# Altium PCB BK5932.PcbDoc
Units mm, origin at the board's own origin, x right, y up, seen from the top; angles counter-clockwise.
Board outline 27.94 x 28.57 mm, 2 copper layers (Top Layer, Bottom Layer); 28 components, 23 nets, 101 pads, 28 vias.
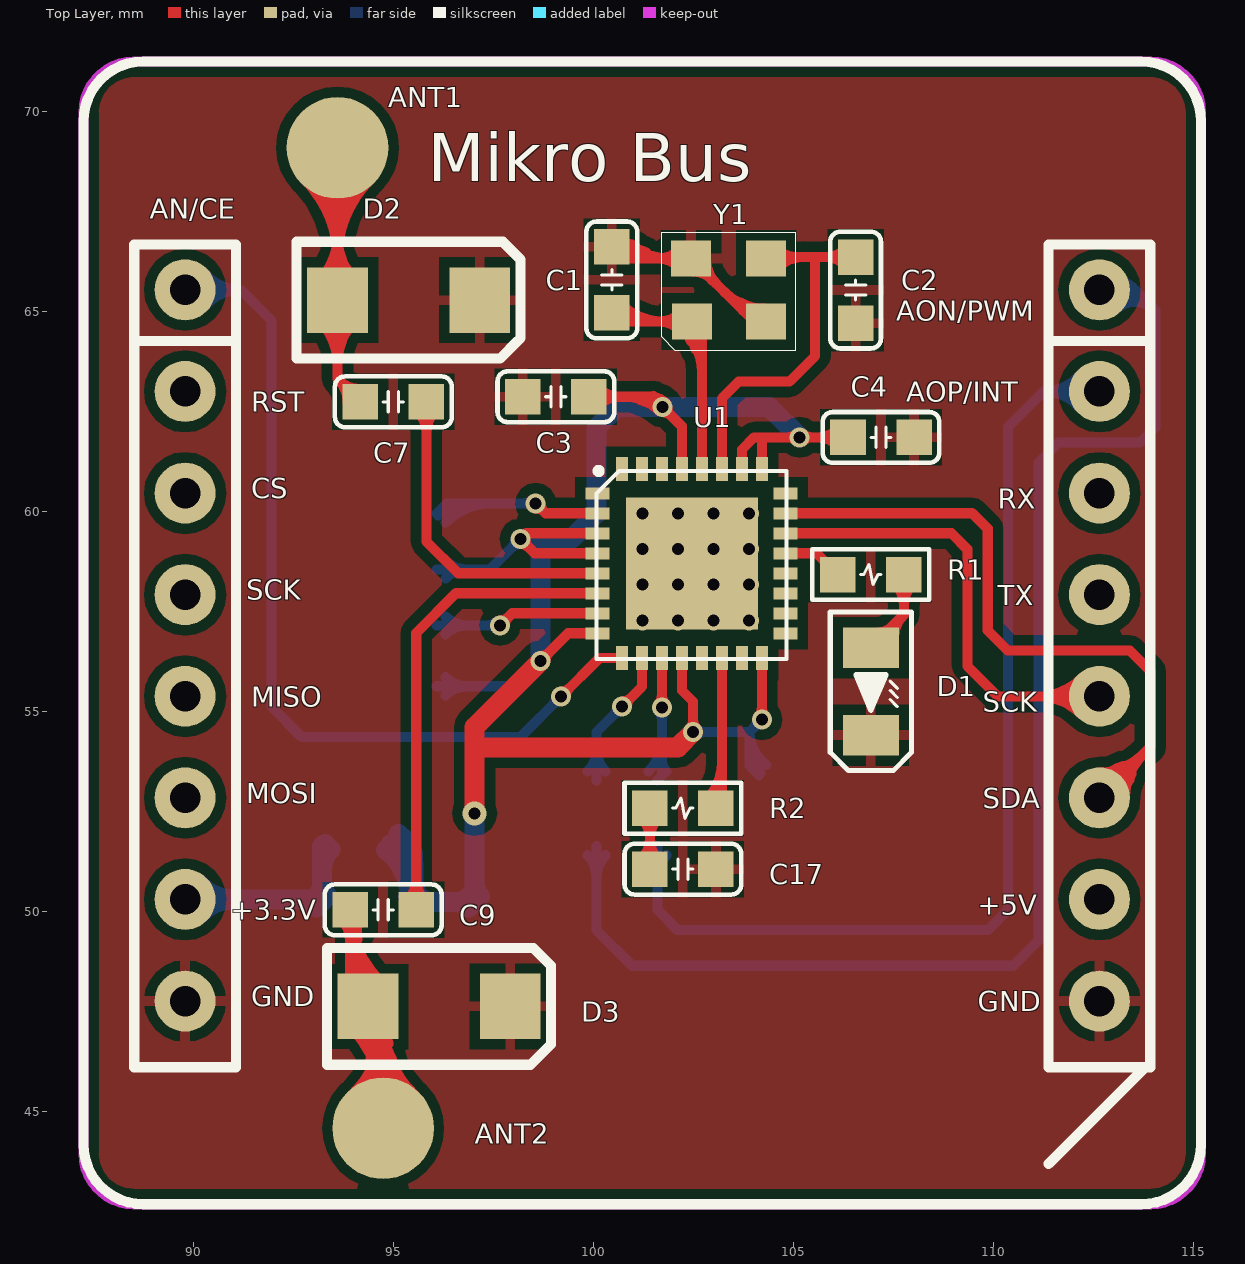
[diagram p0: Top Layer view]
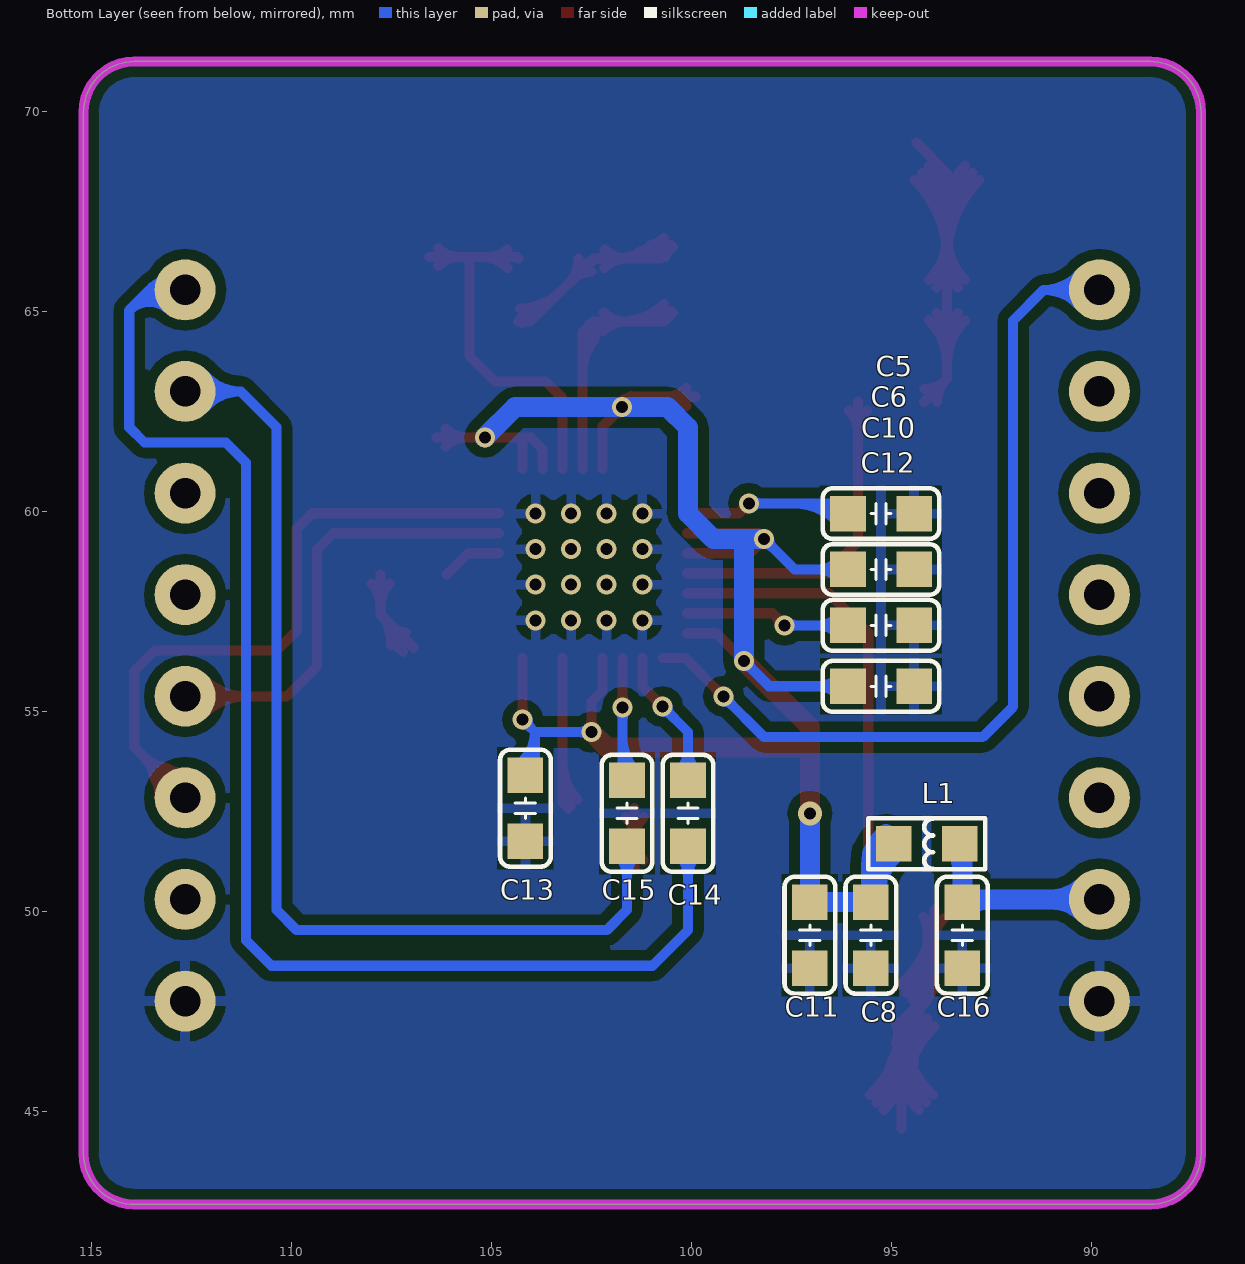
[diagram p1: Bottom Layer view, seen from below]
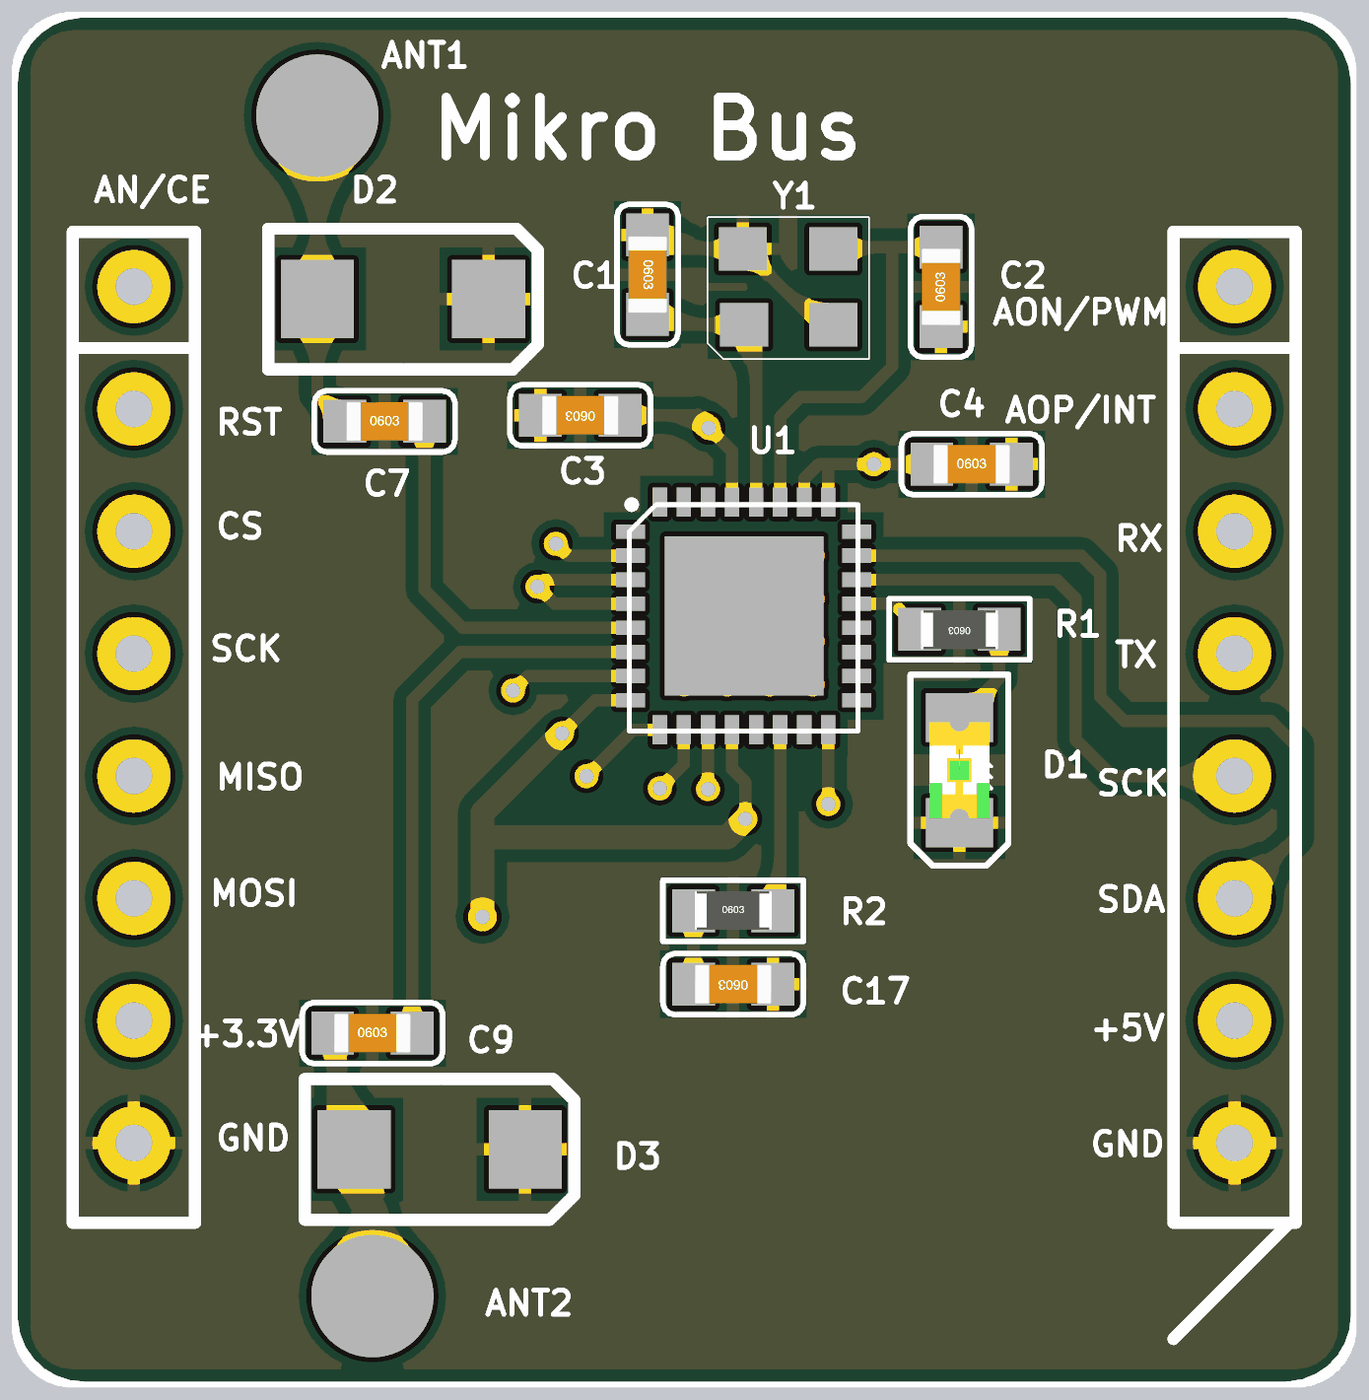
[diagram p2: 3D render of the assembled board from above, using the file's embedded part models]
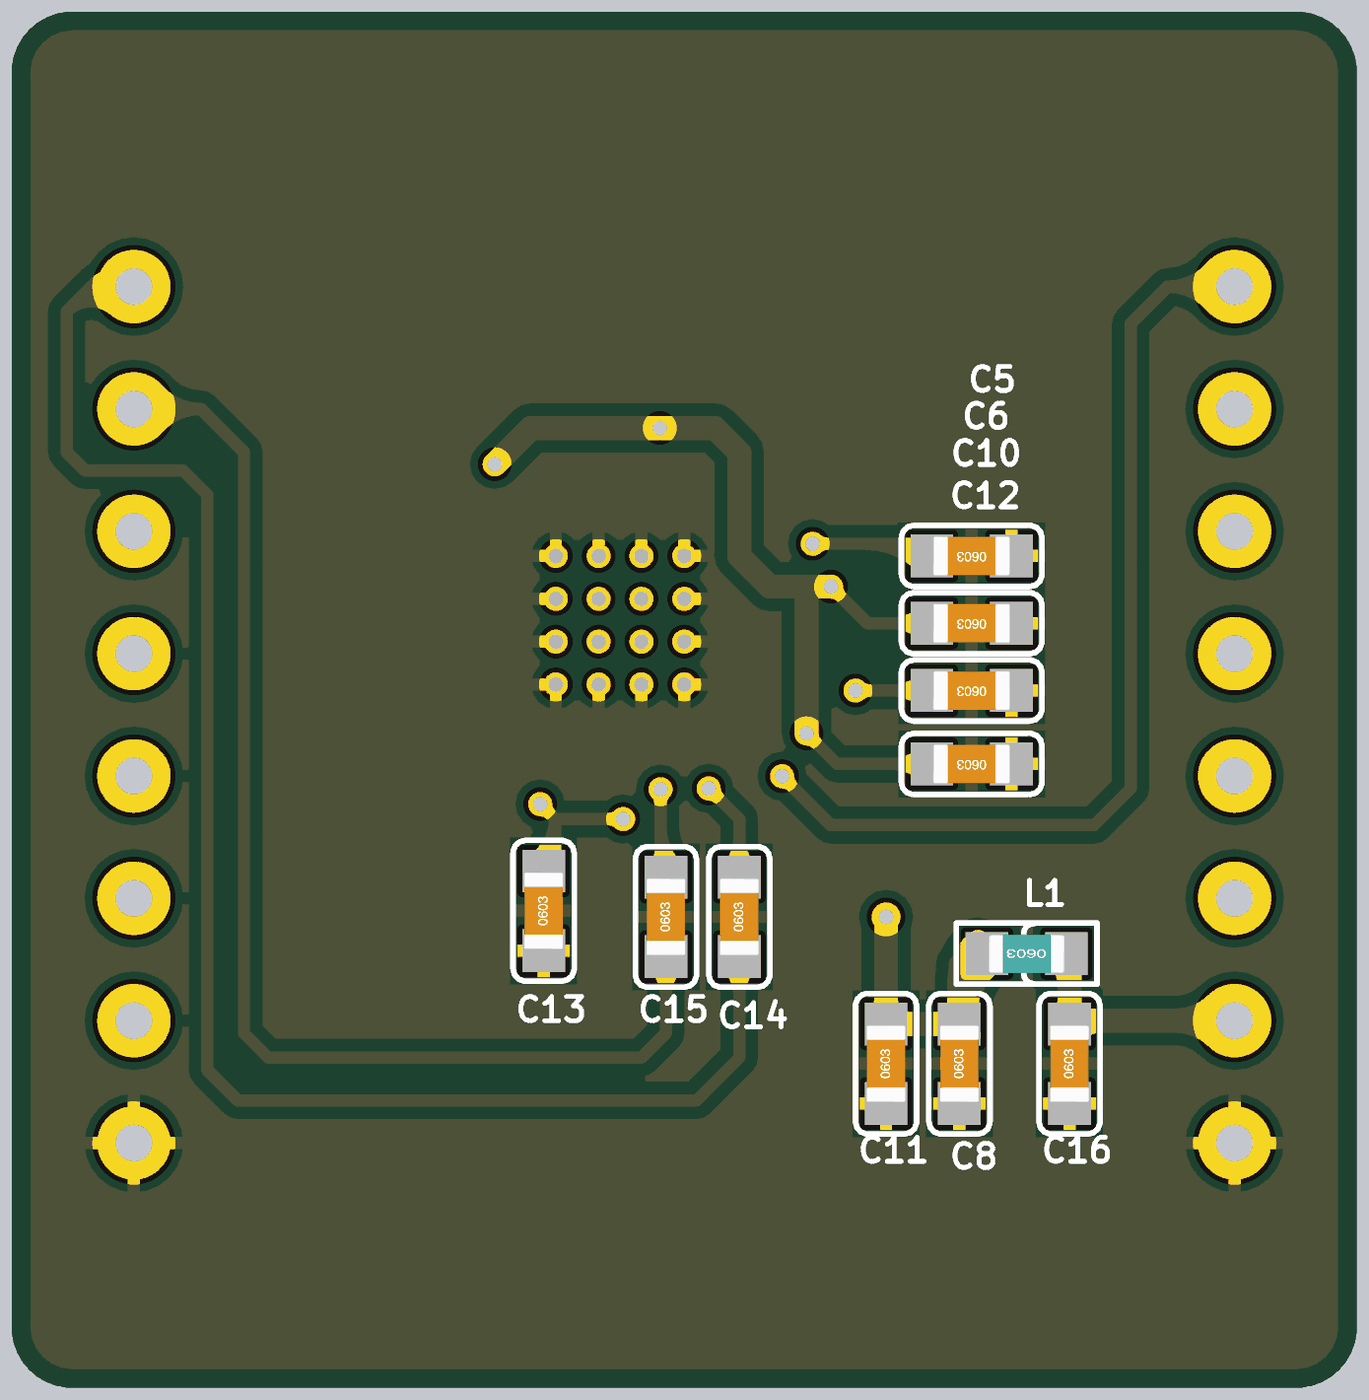
[diagram p3: 3D render of the assembled board from below, using the file's embedded part models]

## Layer stack, top to bottom
Top Solder: solder mask 0.0102, Solder Resist, Dk 3.5
Top Layer: signal copper 0.0356
Dielectric 1: dielectric 0.32, FR-4, Dk 4.8
Bottom Layer: signal copper 0.0356
Bottom Solder: solder mask 0.0102, Solder Resist, Dk 3.5

## Board outline
87.249,43.942 ccw(c88.519,43.942) 88.519,42.672 113.919,42.672 ccw(c113.919,43.942) 115.189,43.942 115.189,69.977 ccw(c113.919,69.977) 113.919,71.247 88.519,71.247 ccw(c88.519,69.977) 87.249,69.977

## Design rules (kind name [scope] priority, off if disabled: settings)
Clearance [All] p1: gap=0.254
PolygonConnect [All] p1: connectstyle=Relief reliefconductorwidth=0.254 reliefentries=4 polygonreliefangle="90 Angle" airgapwidth=0.254
RoutingVias [All] p1: holewidth=0.711 width=1.27 viastyle="Through Hole" minholewidth=0.3 minwidth=0.5 maxholewidth=0.711 maxwidth=1.27
SolderMaskExpansion [All] p1: expansion=0.102
Width [All] p1: maxlimit=1 minlimit=0.254 preferedwidth=0.254
29 further rules are at their usual default settings.

## Components (designator, comment, footprint, x,y, rotation, side; value= is the part's Value field where it differs from the comment)
ANT1 "弹簧天线" ANT 93.599,69.088 r90 top
ANT2 "弹簧天线" ANT 94.742,44.577 r90 top
C1 "10pF" C0603 100.457,65.786 r270 top
C2 "10pF" C0603 106.553,65.532 r90 top
C3 "1uF" C0603 99.06,62.865 r180 top
C4 "1uF" C0603 107.188,61.849 r0 top
C5 "4.7uF" C0603 95.25,59.944 r0 bottom
C6 "1uF" C0603 95.25,58.547 r0 bottom
C7 "30pF" C0603 94.996,62.738 r0 top
C8 "0.1uF" C0603 95.504,49.403 r90 bottom
C9 "30pF" C0603 94.742,50.038 r0 top
C10 "4.7uF" C0603 95.25,57.15 r0 bottom
C11 "10uF" C0603 97.028,49.403 r90 bottom
C12 "1uF" C0603 95.25,55.626 r0 bottom
C13 "1uF" C0603 104.14,52.578 r90 bottom
C14 "2.2uF" C0603 100.076,52.451 r90 bottom
C15 "2.2uF" C0603 101.6,52.451 r90 bottom
C16 "10uF" C0603 93.218,49.403 r90 bottom
C17 "1uF" C0603 102.235,51.054 r180 top
D1 "普红" "LED 0805" 106.934,55.499 r270 top
D2 "SMAJ5.0CA" SMAJ 95.377,65.278 r180 top (schematic designator ESD1)
D3 "SMAJ5.0CA" SMAJ 96.139,47.625 r180 top (schematic designator ESD2)
L1 "1k@100MHz" L0603 94.107,51.689 r0 bottom
R1 "1K" R0603 106.934,58.42 r180 top
R2 "27R" R0603 102.235,52.578 r0 top
U1 "BK9532" QFN32 100.711,60.452 r0 top locked
U2 "MikroBus" MikroBus 87.249,71.247 r0 top locked
Y1 "24.576M" "晶振   有源2520" 103.378,65.532 r0 top

## Footprints (in the part's own frame and the unit in brackets; to place one, negate y for a bottom-side part, rotate by r counter-clockwise, add the part's x,y. Pads: shape width x height; smd on the part's side, far side on the other; paste and mask are expansions set on the pad)
ANT [mm] "弹簧天线"
  round 2.54 smd: 1(0,0)
C0603 [mil] "0603-100nF/25V    104K    贴片层叠电容"
  rect 35x35 smd: 1(-32.5,0) 2(32.5,0)
  silkscreen extent -58,-25 58,25, body extent -31,-16 32,16, height 32
L0603 [mil]
  rect 35x35 smd: 1(-32.5,0) 2(32.5,0)
  silkscreen extent -58,-25 58,25, body extent -31,-15 31,16, height 31
"LED 0805" [mil] "普通亮度，高亮绿灯用"
  rect 40x55 smd: 1(-43,0) 2(43,0)
  silkscreen extent -78,-40 78,40, body extent -39,-25 39,25, height 32
MikroBus [mil] "Mikro Bus General Purpose Module"
  round 60 hole 30: 1(1000,-924.8) 2(1000,-824.8) 3(1000,-724.8) 4(1000,-624.8) 5(1000,-524.8) 6(1000,-424.8) 7(1000,-324.8) 8(1000,-224.8) 9(100,-224.8) 10(100,-324.8) 11(100,-424.8) 12(100,-524.8) 13(100,-624.8) 14(100,-724.8) 15(100,-824.8) 16(100,-924.8)
  silkscreen extent 0,-1125 1100,0
QFN32 [mm] "BK953* 5x5"
  rect 0.6x0.3 smd: 1(-0.61,0) 2(-0.61,-0.5) 3(-0.61,-1) 4(-0.61,-1.5) 5(-0.61,-2) 6(-0.61,-2.5) 7(-0.61,-3) 8(-0.61,-3.5) 17(4.089,-3.5) 18(4.089,-3) 19(4.089,-2.5) 20(4.089,-2) 21(4.089,-1.5) 22(4.089,-1) 23(4.089,-0.5) 24(4.089,0)
  rect 0.3x0.6 smd: 9(0,-4.115) 10(0.5,-4.115) 11(1,-4.115) 12(1.5,-4.115) 13(2,-4.115) 14(2.5,-4.115) 15(3,-4.115) 16(3.5,-4.115) 25(3.5,0.61) 26(3,0.61) 27(2.5,0.61) 28(2,0.61) 29(1.5,0.61) 30(1,0.61) 31(0.5,0.61) 32(0,0.61)
  rect 3.3x3.3 smd: 33(1.753,-1.753)
  silkscreen extent -0.64,-4.14 4.11,0.58
R0603 [mil]
  rect 35x35 smd: 1(-32.5,0) 2(32.5,0)
  silkscreen extent -58,-25 58,25, body extent -31,-15 31,16, height 16
SMAJ [mm]
  rect 1.52x1.63 smd: 1(-1.778,0) 2(1.778,0)
  silkscreen extent -2.8,-1.46 2.8,1.46
"晶振   有源2520" [mm]
  rect 1x0.9 smd: 1(-0.914,-0.787) 2(0.94,-0.787) 3(0.94,0.787) 4(-0.94,0.787)
  silkscreen extent -1.68,-1.5 1.68,1.45

## Part data
ANT1 ANT2: library part ANT, "ANT"
C1 C2: library part "CAP 0603-10pF/50V", "0603-10pF/50V 贴片层叠电容"
C3 C4 C5 C6 C8 C10 C11 C12 C13 C14 C15 C16 C17: library part "CAP 0805-68pF/50V", "0805-68pF/50V-J5%贴片层叠电容"
C7 C9: library part "CAP 0603-33pF/50V", "0603-33pF/50V   贴片层叠电容"
D1: library part "LED  0805普亮贴片红灯", "0805普亮贴片红灯"
D2 D3: library part "ESD 防浪涌二极管", "ESD 二极管"
L1: library part "电感  贴片  33UH", "磁珠"
R1 R2: library part RES1, "1206  K  5%  HS  贴片电阻"
U1: "QFN5x5 32"
Y1: library part "晶振  24.576MHz  49SMD", "（未入库）24.576MHz  2520"

## Via types
v1: diameter 0.5, hole 0.3, Top Layer to Bottom Layer, 27 vias
v2: diameter 0.6, hole 0.3, Top Layer to Bottom Layer, 1 vias

## Nets (pads, with @x,y where several pads share a name; then routed paths per layer and width w, separated by ;. In a path a pad name is that pad's centre, name@x,y a point inside that pad or via, vN(x,y) a via of type N, cw(c..) or ccw(c..) an arc to the next point about the centre after c; other vN are vias at no path point)
+5V: U2.2
AON: C14.1 U2.8 | length 51.8
  Bottom Layer w0.254: C14.1 100.076,49.53 100.965,48.641 110.49,48.641 111.125,49.276 111.125,61.214 111.633,61.722 113.665,61.722 114.046,62.103 114.046,65.024 ; U2.8 113.533,65.537 ; C14.1@99.851,51.401 cw(c99.309,50.859) 100.076,50.859 ; C14.1@99.851,51.401 cw(c99.309,50.859) 100.076,50.859 ; C14.1@99.851,51.401 cw(c99.309,50.859) 100.076,50.859 ; 100.076,50.859 cw(c100.843,50.859) C14.1@100.301,51.401 ; 100.076,50.859 cw(c100.843,50.859) C14.1@100.301,51.401 ; 100.076,50.859 cw(c100.843,50.859) C14.1@100.301,51.401 ; U2.8@112.566,65.633 cw(c113,65.133) 113.468,65.602 ; U2.8@112.566,65.633 cw(c113,65.133) 113.468,65.602 ; U2.8@112.566,65.633 cw(c113,65.133) 113.468,65.602 ; U2.8@112.732,65.441 cw(c113.179,64.927) 113.661,65.409 ; U2.8@112.732,65.441 cw(c113.179,64.927) 113.661,65.409 ; U2.8@112.732,65.441 cw(c113.179,64.927) 113.661,65.409 ; U2.8@112.899,65.25 cw(c113.359,64.722) 113.853,65.217 ; U2.8@112.899,65.25 cw(c113.359,64.722) 113.853,65.217 ; U2.8@112.899,65.25 cw(c113.359,64.722) 113.853,65.217 ; U2.8@113.066,65.058 cw(c113.538,64.516) 114.046,65.024 ; U2.8@113.066,65.058 cw(c113.538,64.516) 114.046,65.024 ; U2.8@113.066,65.058 cw(c113.538,64.516) 114.046,65.024 ; U2.8@113.251,65.334 cw(c113.533,65.239) 113.533,65.537 ; U2.8@113.251,65.334 cw(c113.533,65.239) 113.533,65.537 ; U2.8@113.251,65.334 cw(c113.533,65.239) 113.533,65.537 ; U2.8@113.251,65.74 ccw(c113.533,65.835) 113.533,65.537 ; U2.8@113.251,65.74 ccw(c113.533,65.835) 113.533,65.537 ; U2.8@113.251,65.74 ccw(c113.533,65.835) 113.533,65.537 ; 113.533,65.537 114.046,65.024
AOP: C15.1 U2.7 | length 39
  Bottom Layer w0.254: C15.1 101.6,50.038 102.108,49.53 109.855,49.53 110.363,50.038 110.363,62.103 111.257,62.997 ; U2.7 111.257,62.997 ; C15.1@101.375,51.401 cw(c100.833,50.859) 101.6,50.859 ; C15.1@101.375,51.401 cw(c100.833,50.859) 101.6,50.859 ; C15.1@101.375,51.401 cw(c100.833,50.859) 101.6,50.859 ; 101.6,50.859 cw(c102.367,50.859) C15.1@101.825,51.401 ; 101.6,50.859 cw(c102.367,50.859) C15.1@101.825,51.401 ; 101.6,50.859 cw(c102.367,50.859) C15.1@101.825,51.401 ; 111.257,62.997 cw(c111.257,61.789) U2.7@112.169,62.581 ; 111.257,62.997 ccw(c111.257,64.205) U2.7@112.169,63.413 ; 111.257,62.997 cw(c111.257,61.789) U2.7@112.169,62.581 ; 111.257,62.997 ccw(c111.257,64.205) U2.7@112.169,63.413 ; 111.257,62.997 cw(c111.257,61.789) U2.7@112.169,62.581 ; 111.257,62.997 ccw(c111.257,64.205) U2.7@112.169,63.413 ; 111.814,62.997 cw(c111.814,62.272) U2.7@112.361,62.747 ; 111.814,62.997 ccw(c111.814,63.722) U2.7@112.361,63.247 ; 111.814,62.997 cw(c111.814,62.272) U2.7@112.361,62.747 ; 111.814,62.997 ccw(c111.814,63.722) U2.7@112.361,63.247 ; 111.814,62.997 cw(c111.814,62.272) U2.7@112.361,62.747 ; 111.814,62.997 ccw(c111.814,63.722) U2.7@112.361,63.247
GND: C1.1 C2.1 C3.2 C4.2 C5.1 C6.1 C8.1 C10.1 C11.1 C12.1 C13.1 C16.1 C17.1 D1.2 D2.1 D3.1 U1.33 U2.1 U2.16 Y1.2 Y1.4 | length 34.8
  Top Layer w0.254: C1.1 100.749,66.319 Y1.4 104.013,64.745 Y1.2 ; C1.1@100.502,66.566 cw(c100.811,66.254) 101.031,66.635 ; C1.1@100.502,66.566 cw(c100.811,66.254) 101.031,66.635 ; C1.1@100.502,66.566 cw(c100.811,66.254) 101.031,66.635 ; C1.1@100.502,66.656 ccw(c101.315,67.47) 101.315,66.319 ; C1.1@100.502,66.656 ccw(c101.315,67.47) 101.315,66.319 ; C1.1@100.502,66.656 ccw(c101.315,67.47) 101.315,66.319 ; C1.1@100.646,66.357 cw(c100.832,66.107) 100.987,66.376 ; C1.1@100.646,66.357 cw(c100.832,66.107) 100.987,66.376 ; C1.1@100.646,66.357 cw(c100.832,66.107) 100.987,66.376 ; C1.1@100.68,66.386 cw(c101.053,66.008) 101.319,66.468 ; C1.1@100.68,66.386 cw(c101.053,66.008) 101.319,66.468 ; C1.1@100.68,66.386 cw(c101.053,66.008) 101.319,66.468 ; C1.1@100.682,66.836 ccw(c101.929,68.083) 101.929,66.319 ; C1.1@100.682,66.836 ccw(c101.929,68.083) 101.929,66.319 ; C1.1@100.682,66.836 ccw(c101.929,68.083) 101.929,66.319 ; C1.1@100.767,66.678 ccw(c101.217,66.774) 100.987,66.376 ; C1.1@100.767,66.678 ccw(c101.217,66.774) 100.987,66.376 ; C1.1@100.767,66.678 ccw(c101.217,66.774) 100.987,66.376 ; 101.608,66.319 cw(c101.608,65.54) Y1.4@102.16,66.091 ; 101.608,66.319 ccw(c101.608,67.099) Y1.4@102.16,66.548 ; 101.608,66.319 cw(c101.608,65.54) Y1.4@102.16,66.091 ; 101.608,66.319 ccw(c101.608,67.099) Y1.4@102.16,66.548 ; 101.608,66.319 cw(c101.608,65.54) Y1.4@102.16,66.091 ; 101.608,66.319 ccw(c101.608,67.099) Y1.4@102.16,66.548 ; Y1.4@102.471,66.253 cw(c102.299,65.592) 102.959,65.768 ; Y1.4@102.471,66.253 cw(c102.299,65.592) 102.959,65.768 ; Y1.4@102.471,66.253 cw(c102.299,65.592) 102.959,65.768 ; Y1.4@102.488,65.996 cw(c102.488,65.337) 102.954,65.803 ; Y1.4@102.488,65.996 cw(c102.488,65.337) 102.954,65.803 ; Y1.4@102.488,65.996 cw(c102.488,65.337) 102.954,65.803 ; Y1.4@102.811,66.319 ccw(c103.712,66.319) 103.075,65.683 ; Y1.4@102.811,66.319 ccw(c103.712,66.319) 103.075,65.683 ; Y1.4@102.811,66.319 ccw(c103.712,66.319) 103.075,65.683 ; 103.281,65.476 ccw(c104.268,66.463) Y1.2@104.268,65.068 ; 103.281,65.476 ccw(c104.268,66.463) Y1.2@104.268,65.068 ; 103.281,65.476 ccw(c104.268,66.463) Y1.2@104.268,65.068 ; 103.568,65.255 cw(c103.316,64.311) Y1.2@104.205,64.716 ; 103.568,65.255 cw(c103.316,64.311) Y1.2@104.205,64.716 ; 103.568,65.255 cw(c103.316,64.311) Y1.2@104.205,64.716 ; 103.715,65.043 ccw(c104.268,65.595) Y1.2@104.268,64.814 ; 103.715,65.043 ccw(c104.268,65.595) Y1.2@104.268,64.814 ; 103.715,65.043 ccw(c104.268,65.595) Y1.2@104.268,64.814
  other v1: 101.219,57.277 102.108,57.277 102.997,57.277 103.886,57.277 101.219,58.166 102.108,58.166 102.997,58.166 103.886,58.166 101.219,59.055 102.108,59.055 102.997,59.055 103.886,59.055 101.219,59.944 102.108,59.944 102.997,59.944 103.886,59.944
NetANT1_1: ANT1.1 C7.1 D2.2 | length 64
  Top Layer w0.254: C7.1 93.599,63.309 D2.2 93.599,68.453 ANT1.1@94.361,69.215 ; ANT1.1@92.791,68.28 cw(c90.84,66.329) 93.599,66.329 ; ANT1.1@92.791,68.28 cw(c90.84,66.329) 93.599,66.329 ; ANT1.1@92.791,68.28 cw(c90.84,66.329) 93.599,66.329 ; ANT1.1@92.97,68.459 cw(c91.453,66.942) 93.599,66.942 ; ANT1.1@92.97,68.459 cw(c91.453,66.942) 93.599,66.942 ; ANT1.1@92.97,68.459 cw(c91.453,66.942) 93.599,66.942 ; ANT1.1@93.15,68.639 cw(c92.066,67.555) 93.599,67.555 ; ANT1.1@93.15,68.639 cw(c92.066,67.555) 93.599,67.555 ; ANT1.1@93.15,68.639 cw(c92.066,67.555) 93.599,67.555 ; D2.2@93.151,64.775 cw(c92.071,63.695) 93.599,63.695 ; D2.2@93.151,64.775 cw(c92.071,63.695) 93.599,63.695 ; D2.2@93.151,64.775 cw(c92.071,63.695) 93.599,63.695 ; D2.2@93.151,65.781 ccw(c92.071,66.861) 93.599,66.861 ; D2.2@93.151,65.781 ccw(c92.071,66.861) 93.599,66.861 ; D2.2@93.151,65.781 ccw(c92.071,66.861) 93.599,66.861 ; D2.2@93.331,64.955 cw(c92.684,64.308) 93.599,64.308 ; D2.2@93.331,64.955 cw(c92.684,64.308) 93.599,64.308 ; D2.2@93.331,64.955 cw(c92.684,64.308) 93.599,64.308 ; D2.2@93.331,65.601 ccw(c92.684,66.248) 93.599,66.248 ; D2.2@93.331,65.601 ccw(c92.684,66.248) 93.599,66.248 ; D2.2@93.331,65.601 ccw(c92.684,66.248) 93.599,66.248 ; 93.599,63.695 cw(c95.127,63.695) D2.2@94.047,64.775 ; 93.599,63.695 cw(c95.127,63.695) D2.2@94.047,64.775 ; 93.599,63.695 cw(c95.127,63.695) D2.2@94.047,64.775 ; 93.599,64.308 cw(c94.514,64.308) D2.2@93.867,64.955 ; 93.599,64.308 cw(c94.514,64.308) D2.2@93.867,64.955 ; 93.599,64.308 cw(c94.514,64.308) D2.2@93.867,64.955 ; 93.599,66.248 ccw(c94.514,66.248) D2.2@93.867,65.601 ; 93.599,66.248 ccw(c94.514,66.248) D2.2@93.867,65.601 ; 93.599,66.248 ccw(c94.514,66.248) D2.2@93.867,65.601 ; 93.599,66.329 cw(c96.358,66.329) ANT1.1@94.407,68.28 ; 93.599,66.329 cw(c96.358,66.329) ANT1.1@94.407,68.28 ; 93.599,66.329 cw(c96.358,66.329) ANT1.1@94.407,68.28 ; 93.599,66.861 ccw(c95.127,66.861) D2.2@94.047,65.781 ; 93.599,66.861 ccw(c95.127,66.861) D2.2@94.047,65.781 ; 93.599,66.861 ccw(c95.127,66.861) D2.2@94.047,65.781 ; 93.599,66.942 cw(c95.745,66.942) ANT1.1@94.228,68.459 ; 93.599,66.942 cw(c95.745,66.942) ANT1.1@94.228,68.459 ; 93.599,66.942 cw(c95.745,66.942) ANT1.1@94.228,68.459 ; 93.599,67.555 cw(c95.132,67.555) ANT1.1@94.048,68.639 ; 93.599,67.555 cw(c95.132,67.555) ANT1.1@94.048,68.639 ; 93.599,67.555 cw(c95.132,67.555) ANT1.1@94.048,68.639 ; 93.628,63.28 cw(c93.086,62.738) C7.1@93.853,62.738 ; 93.628,63.28 ccw(c94.17,63.822) C7.1@94.17,63.055 ; 93.628,63.28 cw(c93.086,62.738) C7.1@93.853,62.738 ; 93.628,63.28 ccw(c94.17,63.822) C7.1@94.17,63.055 ; 93.628,63.28 cw(c93.086,62.738) C7.1@93.853,62.738 ; 93.628,63.28 ccw(c94.17,63.822) C7.1@94.17,63.055
NetANT2_1: ANT2.1 C9.1 D3.2 | length 119.5
  Top Layer w0.254: D3.2@94.636,47.31 ccw(c94.92,47.042) 94.643,46.766 ; ANT2.1 D3.2@94.742,47.244 ; D3.2@94.821,47.135 ccw(c95.111,46.861) 94.828,46.58 ; C9.1@93.692,49.813 cw(c93.15,49.271) 93.916,49.271 ; C9.1@93.692,49.813 cw(c93.15,49.271) 93.916,49.271 ; C9.1@93.692,49.813 cw(c93.15,49.271) 93.916,49.271 ; C9.1@93.753,49.766 cw(c93.359,49.108) 94.103,49.295 ; C9.1@93.753,49.766 cw(c93.359,49.108) 94.103,49.295 ; C9.1@93.753,49.766 cw(c93.359,49.108) 94.103,49.295 ; C9.1@93.753,49.766 cw(c93.359,49.108) 94.103,49.295 ; C9.1@93.753,49.766 cw(c93.359,49.108) 94.103,49.295 ; C9.1@93.753,49.766 cw(c93.359,49.108) 94.103,49.295 ; D3.2@93.913,47.122 cw(c91.913,45.122) ANT2.1@94.742,45.122 ; D3.2@93.913,47.122 cw(c91.913,45.122) ANT2.1@94.742,45.122 ; D3.2@93.913,47.122 cw(c91.913,45.122) ANT2.1@94.742,45.122 ; D3.2@93.916,48.37 ccw(c94.959,48.37) D3.2@94.277,47.582 ; D3.2@93.916,48.37 ccw(c94.959,48.37) D3.2@94.277,47.582 ; D3.2@93.916,48.37 ccw(c94.959,48.37) D3.2@94.277,47.582 ; 93.916,48.926 ccw(c95.44,48.926) D3.2@94.443,47.775 ; 93.916,48.926 ccw(c95.44,48.926) D3.2@94.443,47.775 ; 93.916,48.926 ccw(c95.44,48.926) D3.2@94.443,47.775 ; 93.916,49.271 cw(c94.683,49.271) C9.1@94.141,49.813 ; 93.916,49.271 cw(c94.683,49.271) C9.1@94.141,49.813 ; 93.916,49.271 cw(c94.683,49.271) C9.1@94.141,49.813 ; 93.916,49.482 ccw(c95.921,49.482) D3.2@94.609,47.967 ; 93.916,49.482 ccw(c95.921,49.482) D3.2@94.609,47.967 ; 93.916,49.482 ccw(c95.921,49.482) D3.2@94.609,47.967 ; C9.1 ccw(c96.402,50.038) D3.2@94.775,48.159 ; C9.1 ccw(c96.402,50.038) D3.2@94.775,48.159 ; C9.1 ccw(c96.402,50.038) D3.2@94.775,48.159 ; C9.1 93.916,48.069 D3.2 D3.2@94.742,47.244 ; ANT2.1@93.954,45.405 ccw(c92.202,47.244) D3.2@94.742,47.244 ; ANT2.1@93.954,45.405 ccw(c92.202,47.244) D3.2@94.742,47.244 ; ANT2.1@93.954,45.405 ccw(c92.202,47.244) D3.2@94.742,47.244 ; D3.2@94.093,47.302 cw(c92.526,45.735) ANT2.1@94.742,45.735 ; D3.2@94.093,47.302 cw(c92.526,45.735) ANT2.1@94.742,45.735 ; D3.2@94.093,47.302 cw(c92.526,45.735) ANT2.1@94.742,45.735 ; 94.103,49.294 cw(c94.846,49.481) C9.1@94.189,49.875 ; 94.103,49.294 cw(c94.846,49.481) C9.1@94.189,49.875 ; 94.103,49.294 cw(c94.846,49.481) C9.1@94.189,49.875 ; 94.103,49.294 cw(c94.846,49.481) C9.1@94.189,49.875 ; 94.103,49.294 cw(c94.846,49.481) C9.1@94.189,49.875 ; 94.103,49.294 cw(c94.846,49.481) C9.1@94.189,49.875 ; ANT2.1@94.129,45.221 ccw(c92.767,46.651) 94.742,46.651 ; ANT2.1@94.129,45.221 ccw(c92.767,46.651) 94.742,46.651 ; ANT2.1@94.129,45.221 ccw(c92.767,46.651) 94.742,46.651 ; ANT2.1@94.13,45.543 ccw(c93.763,46.123) 94.426,46.3 ; ANT2.1@94.13,45.543 ccw(c93.763,46.123) 94.426,46.3 ; ANT2.1@94.13,45.543 ccw(c93.763,46.123) 94.426,46.3 ; ANT2.1@94.13,45.543 ccw(c93.763,46.123) 94.426,46.3 ; ANT2.1@94.13,45.543 ccw(c93.763,46.123) 94.426,46.3 ; ANT2.1@94.13,45.543 ccw(c93.763,46.123) 94.426,46.3 ; D3.2@94.17,47.242 cw(c93.262,45.68) 95.018,46.106 ; D3.2@94.17,47.242 cw(c93.262,45.68) 95.018,46.106 ; D3.2@94.17,47.242 cw(c93.262,45.68) 95.018,46.106 ; ANT2.1@94.266,45.328 ccw(c93.957,45.817) 94.516,45.967 ; ANT2.1@94.266,45.328 ccw(c93.957,45.817) 94.516,45.967 ; ANT2.1@94.266,45.328 ccw(c93.957,45.817) 94.516,45.967 ; ANT2.1@94.266,45.328 ccw(c93.957,45.817) 94.516,45.967 ; ANT2.1@94.266,45.328 ccw(c93.957,45.817) 94.516,45.967 ; ANT2.1@94.266,45.328 ccw(c93.957,45.817) 94.516,45.967 ; D3.2@94.273,47.482 cw(c93.139,46.348) 94.742,46.348 ; D3.2@94.273,47.482 cw(c93.139,46.348) 94.742,46.348 ; D3.2@94.273,47.482 cw(c93.139,46.348) 94.742,46.348 ; D3.2@94.298,47.462 cw(c93.677,46.394) 94.877,46.685 ; D3.2@94.298,47.462 cw(c93.677,46.394) 94.877,46.685 ; D3.2@94.298,47.462 cw(c93.677,46.394) 94.877,46.685 ; ANT2.1@94.304,45.037 ccw(c93.331,46.059) 94.742,46.059 ; ANT2.1@94.304,45.037 ccw(c93.331,46.059) 94.742,46.059 ; ANT2.1@94.304,45.037 ccw(c93.331,46.059) 94.742,46.059 ; D3.2@94.425,46.94 cw(c94.448,46.706) D3.2@94.653,46.824 ; D3.2@94.425,46.94 cw(c94.448,46.706) D3.2@94.653,46.824 ; D3.2@94.425,46.94 cw(c94.448,46.706) D3.2@94.653,46.824 ; 94.426,46.3 ccw(c95.276,46.528) ANT2.1@95.044,45.679 ; 94.426,46.3 ccw(c95.276,46.528) ANT2.1@95.044,45.679 ; 94.426,46.3 ccw(c95.276,46.528) ANT2.1@95.044,45.679 ; 94.426,46.3 ccw(c95.276,46.528) ANT2.1@95.044,45.679 ; 94.426,46.3 ccw(c95.276,46.528) ANT2.1@95.044,45.679 ; 94.426,46.3 ccw(c95.276,46.528) ANT2.1@95.044,45.679 ; 94.429,46.719 cw(c94.769,46.916) D3.2@94.562,47.248 ; 94.429,46.719 cw(c94.769,46.916) D3.2@94.562,47.248 ; 94.429,46.719 cw(c94.769,46.916) D3.2@94.562,47.248 ; ANT2.1@94.444,45.68 ccw(c94.359,45.994) 94.677,46.058 ; ANT2.1@94.444,45.68 ccw(c94.359,45.994) 94.677,46.058 ; ANT2.1@94.444,45.68 ccw(c94.359,45.994) 94.677,46.058 ; ANT2.1@94.444,45.68 ccw(c94.359,45.994) 94.677,46.058 ; ANT2.1@94.444,45.68 ccw(c94.359,45.994) 94.677,46.058 ; ANT2.1@94.444,45.68 ccw(c94.359,45.994) 94.677,46.058 ; 94.541,45.873 ccw(c95.141,46.034) ANT2.1@94.977,45.434 ; 94.541,45.873 ccw(c95.141,46.034) ANT2.1@94.977,45.434 ; 94.541,45.873 ccw(c95.141,46.034) ANT2.1@94.977,45.434 ; 94.541,45.873 ccw(c95.141,46.034) ANT2.1@94.977,45.434 ; 94.541,45.873 ccw(c95.141,46.034) ANT2.1@94.977,45.434 ; 94.541,45.873 ccw(c95.141,46.034) ANT2.1@94.977,45.434 ; 94.561,46.492 cw(c94.908,46.692) D3.2@94.696,47.033 ; 94.561,46.492 cw(c94.908,46.692) D3.2@94.696,47.033 ; 94.561,46.492 cw(c94.908,46.692) D3.2@94.696,47.033 ; D3.2@94.653,46.824 cw(c94.791,46.904) D3.2@94.704,47.038 ; D3.2@94.653,46.824 cw(c94.791,46.904) D3.2@94.704,47.038 ; D3.2@94.653,46.824 cw(c94.791,46.904) D3.2@94.704,47.038 ; 94.677,46.058 ccw(c95.154,46.154) ANT2.1@95.031,45.683 ; 94.677,46.058 ccw(c95.154,46.154) ANT2.1@95.031,45.683 ; 94.677,46.058 ccw(c95.154,46.154) ANT2.1@95.031,45.683 ; 94.677,46.058 ccw(c95.154,46.154) ANT2.1@95.031,45.683 ; 94.677,46.058 ccw(c95.154,46.154) ANT2.1@95.031,45.683 ; 94.677,46.058 ccw(c95.154,46.154) ANT2.1@95.031,45.683 ; 94.742,46.059 ccw(c96.153,46.059) ANT2.1@95.18,45.037 ; 94.742,46.059 ccw(c96.153,46.059) ANT2.1@95.18,45.037 ; 94.742,46.059 ccw(c96.153,46.059) ANT2.1@95.18,45.037 ; 94.742,46.651 ccw(c96.717,46.651) ANT2.1@95.355,45.221 ; 94.742,46.651 ccw(c96.717,46.651) ANT2.1@95.355,45.221 ; 94.742,46.651 ccw(c96.717,46.651) ANT2.1@95.355,45.221 ; D3.2@94.742,47.244 ccw(c97.282,47.244) ANT2.1@95.53,45.405 ; D3.2@94.742,47.244 ccw(c97.282,47.244) ANT2.1@95.53,45.405 ; D3.2@94.742,47.244 ccw(c97.282,47.244) ANT2.1@95.53,45.405 ; D3.2@94.839,46.842 cw(c95.351,46.966) D3.2@94.902,47.241 ; D3.2@94.839,46.842 cw(c95.351,46.966) D3.2@94.902,47.241 ; D3.2@94.839,46.842 cw(c95.351,46.966) D3.2@94.902,47.241
NetC1_2: C1.2 U1.28 Y1.1 | length 20.5
  Top Layer w0.254: C1.2 100.673,64.745 Y1.1 102.711,64.497 U1.28 ; 101.634,64.745 cw(c101.634,63.965) 102.185,64.516 ccw(c101.634,63.965) 101.634,64.745 ; 101.634,64.745 ccw(c101.634,65.524) 102.185,64.973 cw(c101.634,65.524) 101.634,64.745 ; Y1.1@102.285,64.516 cw(c101.257,63.488) 102.711,63.488 ; Y1.1@102.285,64.516 cw(c101.257,63.488) 102.711,63.488 ; Y1.1@102.285,64.516 cw(c101.257,63.488) 102.711,63.488 ; 102.44,64.248 cw(c102.721,64.41) Y1.1@102.55,64.686 ; 102.44,64.248 cw(c102.721,64.41) Y1.1@102.55,64.686 ; 102.44,64.248 cw(c102.721,64.41) Y1.1@102.55,64.686 ; Y1.1@102.465,64.696 cw(c101.87,64.101) 102.711,64.101 ; Y1.1@102.465,64.696 cw(c101.87,64.101) 102.711,64.101 ; Y1.1@102.465,64.696 cw(c101.87,64.101) 102.711,64.101 ; 102.571,64.021 cw(c102.86,64.187) Y1.1@102.684,64.47 ; 102.571,64.021 cw(c102.86,64.187) Y1.1@102.684,64.47 ; 102.571,64.021 cw(c102.86,64.187) Y1.1@102.684,64.47 ; C1.2@100.502,65.005 ccw(c101.132,65.635) 101.132,64.745 cw(c101.132,65.635) C1.2@100.502,65.005 ; C1.2@100.682,65.185 ccw(c101.745,66.248) 101.745,64.745 cw(c101.745,66.248) C1.2@100.682,65.185
NetC2_2: C2.2 U1.27 Y1.3 | length 16.5
  Top Layer w0.254: U1.27 103.211,62.825 103.632,63.246 104.902,63.246 105.537,63.881 105.537,66.358 ; Y1.3 104.356,66.358 C2.2 ; Y1.3@104.596,66.091 cw(c105.24,65.448) 105.24,66.358 ; Y1.3@104.596,66.091 cw(c105.24,65.448) 105.24,66.358 ; Y1.3@104.596,66.091 cw(c105.24,65.448) 105.24,66.358 ; Y1.3@104.596,66.548 ccw(c105.056,67.007) 105.056,66.358 ; Y1.3@104.596,66.548 ccw(c105.056,67.007) 105.056,66.358 ; Y1.3@104.596,66.548 ccw(c105.056,67.007) 105.056,66.358 ; 105.786,66.358 cw(c105.786,65.591) C2.2@106.328,66.133 ; 105.786,66.358 ccw(c105.786,67.124) C2.2@106.328,66.582 ; 105.786,66.358 cw(c105.786,65.591) C2.2@106.328,66.133 ; 105.786,66.358 ccw(c105.786,67.124) C2.2@106.328,66.582 ; 105.786,66.358 cw(c105.786,65.591) C2.2@106.328,66.133 ; 105.786,66.358 ccw(c105.786,67.124) C2.2@106.328,66.582
NetC3_1: C3.1 C4.1 C6.2 C8.2 C11.2 C12.2 C13.2 L1.2 U1.3 U1.4 U1.8 U1.12 U1.16 U1.25 U1.26 U1.29 | length 122
  Top Layer w0.254: v1(98.679,56.261) 99.37,56.952 U1.8 ; C3.1 101.465,62.865 v1(101.727,62.603) 102.203,62.127 ; U1.4 98.528,58.952 v1(98.171,59.309) 98.314,59.452 U1.3 ; 102.207,62.131 102.211,62.127 U1.29 ; U1.12 102.211,55.523 102.489,55.245 v1(102.489,54.483) ; U1.26 103.711,61.547 104.013,61.849 v1(105.156,61.849) C4.1 ; v1(104.211,54.793) U1.16 ; U1.25 104.211,61.793 ; v1@98.171,59.186 cw(c98.171,58.889) 98.381,59.099 ; v1@98.171,59.186 cw(c98.171,58.889) 98.381,59.099 ; v1@98.171,59.186 cw(c98.171,58.889) 98.381,59.099 ; v1@98.294,59.309 ccw(c98.591,59.309) 98.381,59.099 ; v1@98.294,59.309 ccw(c98.591,59.309) 98.381,59.099 ; v1@98.294,59.309 ccw(c98.591,59.309) 98.381,59.099 ; v1@98.679,56.384 ccw(c98.679,56.681) 98.889,56.471 ; v1@98.679,56.384 ccw(c98.679,56.681) 98.889,56.471 ; v1@98.679,56.384 ccw(c98.679,56.681) 98.889,56.471 ; v1@98.802,56.261 cw(c99.099,56.261) 98.889,56.471 ; v1@98.802,56.261 cw(c99.099,56.261) 98.889,56.471 ; v1@98.802,56.261 cw(c99.099,56.261) 98.889,56.471 ; C3.1@100.11,62.64 cw(c100.652,62.098) 100.652,62.865 ; C3.1@100.11,62.64 cw(c100.652,62.098) 100.652,62.865 ; C3.1@100.11,62.64 cw(c100.652,62.098) 100.652,62.865 ; C3.1@100.11,63.09 ccw(c100.652,63.632) 100.652,62.865 ; C3.1@100.11,63.09 ccw(c100.652,63.632) 100.652,62.865 ; C3.1@100.11,63.09 ccw(c100.652,63.632) 100.652,62.865 ; 100.798,62.865 cw(c100.798,61.674) v1@101.64,62.516 ; 100.798,62.865 cw(c100.798,61.674) v1@101.64,62.516 ; 100.798,62.865 cw(c100.798,61.674) v1@101.64,62.516 ; 101.165,62.79 ccw(c101.512,63.391) v1@101.695,62.722 ; 101.165,62.79 ccw(c101.512,63.391) v1@101.695,62.722 ; 101.165,62.79 ccw(c101.512,63.391) v1@101.695,62.722 ; 101.411,62.865 cw(c101.411,62.287) v1@101.82,62.696 ; 101.411,62.865 cw(c101.411,62.287) v1@101.82,62.696 ; 101.411,62.865 cw(c101.411,62.287) v1@101.82,62.696 ; 101.497,62.882 cw(c101.381,62.681) v1@101.607,62.63 ; 101.497,62.882 cw(c101.381,62.681) v1@101.607,62.63 ; 101.497,62.882 cw(c101.381,62.681) v1@101.607,62.63 ; 101.517,62.813 cw(c101.307,62.603) v1@101.604,62.603 ; 101.517,62.813 ccw(c101.727,63.023) v1@101.727,62.726 ; 101.517,62.813 cw(c101.307,62.603) v1@101.604,62.603 ; 101.517,62.813 ccw(c101.727,63.023) v1@101.727,62.726 ; 101.517,62.813 cw(c101.307,62.603) v1@101.604,62.603 ; 101.517,62.813 ccw(c101.727,63.023) v1@101.727,62.726 ; v1@101.727,62.48 cw(c101.727,62.183) 101.937,62.393 ; v1@101.727,62.48 cw(c101.727,62.183) 101.937,62.393 ; v1@101.727,62.48 cw(c101.727,62.183) 101.937,62.393 ; v1@101.85,62.603 ccw(c102.147,62.603) 101.937,62.393 ; v1@101.85,62.603 ccw(c102.147,62.603) 101.937,62.393 ; v1@101.85,62.603 ccw(c102.147,62.603) 101.937,62.393 ; v1@102.402,54.57 ccw(c102.192,54.78) 102.489,54.78 ; v1@102.402,54.57 ccw(c102.192,54.78) 102.489,54.78 ; v1@102.402,54.57 ccw(c102.192,54.78) 102.489,54.78 ; 102.489,54.78 ccw(c102.786,54.78) v1@102.576,54.57 ; 102.489,54.78 ccw(c102.786,54.78) v1@102.576,54.57 ; 102.489,54.78 ccw(c102.786,54.78) v1@102.576,54.57 ; v1@104.124,54.88 ccw(c103.914,55.09) 104.211,55.09 ; v1@104.124,54.88 ccw(c103.914,55.09) 104.211,55.09 ; v1@104.124,54.88 ccw(c103.914,55.09) 104.211,55.09 ; 104.211,55.09 ccw(c104.508,55.09) v1@104.298,54.88 ; 104.211,55.09 ccw(c104.508,55.09) v1@104.298,54.88 ; 104.211,55.09 ccw(c104.508,55.09) v1@104.298,54.88 ; 104.859,61.849 cw(c104.859,61.552) v1@105.069,61.762 ; 104.859,61.849 ccw(c104.859,62.146) v1@105.069,61.936 ; 104.859,61.849 cw(c104.859,61.552) v1@105.069,61.762 ; 104.859,61.849 ccw(c104.859,62.146) v1@105.069,61.936 ; 104.859,61.849 cw(c104.859,61.552) v1@105.069,61.762 ; 104.859,61.849 ccw(c104.859,62.146) v1@105.069,61.936 ; v1@105.243,61.762 cw(c105.453,61.552) 105.453,61.849 ; v1@105.243,61.762 cw(c105.453,61.552) 105.453,61.849 ; v1@105.243,61.762 cw(c105.453,61.552) 105.453,61.849 ; v1@105.243,61.936 ccw(c105.453,62.146) 105.453,61.849 ; v1@105.243,61.936 ccw(c105.453,62.146) 105.453,61.849 ; v1@105.243,61.936 ccw(c105.453,62.146) 105.453,61.849 ; 105.596,61.849 cw(c105.596,61.082) C4.1@106.138,61.624 ; 105.596,61.849 ccw(c105.596,62.616) C4.1@106.138,62.074 ; 105.596,61.849 cw(c105.596,61.082) C4.1@106.138,61.624 ; 105.596,61.849 ccw(c105.596,62.616) C4.1@106.138,62.074 ; 105.596,61.849 cw(c105.596,61.082) C4.1@106.138,61.624 ; 105.596,61.849 ccw(c105.596,62.616) C4.1@106.138,62.074
  Top Layer w0.5: v2(97.028,52.451) 97.028,54.102 ; v1(98.679,56.261) 97.028,54.61 97.028,54.102 ; v1(102.489,54.483) 102.108,54.102 97.028,54.102
  Bottom Layer w0.254: C12.2 98.044,55.626 v1(98.679,56.261) ; C6.2 97.409,58.547 v1(98.171,59.309) ; v1(102.489,54.483) 103.901,54.483 ; C13.2 103.901,53.642 103.901,54.483 ; v1(104.211,54.793) 103.901,54.483 ; C12.2@96.3,55.401 cw(c96.842,54.859) 96.842,55.626 ; C12.2@96.3,55.401 cw(c96.842,54.859) 96.842,55.626 ; C12.2@96.3,55.401 cw(c96.842,54.859) 96.842,55.626 ; C12.2@96.3,55.851 ccw(c96.842,56.393) 96.842,55.626 ; C12.2@96.3,55.851 ccw(c96.842,56.393) 96.842,55.626 ; C12.2@96.3,55.851 ccw(c96.842,56.393) 96.842,55.626 ; C6.2@96.3,58.322 cw(c96.842,57.78) 96.842,58.547 ; C6.2@96.3,58.322 cw(c96.842,57.78) 96.842,58.547 ; C6.2@96.3,58.322 cw(c96.842,57.78) 96.842,58.547 ; C6.2@96.3,58.772 ccw(c96.842,59.314) 96.842,58.547 ; C6.2@96.3,58.772 ccw(c96.842,59.314) 96.842,58.547 ; C6.2@96.3,58.772 ccw(c96.842,59.314) 96.842,58.547 ; 97.961,59.099 cw(c98.171,58.889) v1@98.171,59.186 ; 97.961,59.099 ccw(c97.751,59.309) v1@98.048,59.309 ; 97.961,59.099 cw(c98.171,58.889) v1@98.171,59.186 ; 97.961,59.099 ccw(c97.751,59.309) v1@98.048,59.309 ; 97.961,59.099 cw(c98.171,58.889) v1@98.171,59.186 ; 97.961,59.099 ccw(c97.751,59.309) v1@98.048,59.309 ; 98.469,56.051 cw(c98.679,55.841) v1@98.679,56.138 ; 98.469,56.051 ccw(c98.259,56.261) v1@98.556,56.261 ; 98.469,56.051 cw(c98.679,55.841) v1@98.679,56.138 ; 98.469,56.051 ccw(c98.259,56.261) v1@98.556,56.261 ; 98.469,56.051 cw(c98.679,55.841) v1@98.679,56.138 ; 98.469,56.051 ccw(c98.259,56.261) v1@98.556,56.261 ; v1@102.576,54.396 cw(c102.786,54.186) 102.786,54.483 ; v1@102.576,54.396 cw(c102.786,54.186) 102.786,54.483 ; v1@102.576,54.396 cw(c102.786,54.186) 102.786,54.483 ; v1@102.576,54.57 ccw(c102.786,54.78) 102.786,54.483 ; v1@102.576,54.57 ccw(c102.786,54.78) 102.786,54.483 ; v1@102.576,54.57 ccw(c102.786,54.78) 102.786,54.483 ; 103.901,53.99 ccw(c104.558,53.99) C13.2@104.177,53.455 ; 103.901,53.99 ccw(c104.558,53.99) C13.2@104.177,53.455 ; 103.901,53.99 ccw(c104.558,53.99) C13.2@104.177,53.455 ; 103.901,54.483 ccw(c104.909,54.483) C13.2@104.324,53.662 ; 103.901,54.483 ccw(c104.909,54.483) C13.2@104.324,53.662 ; 103.901,54.483 ccw(c104.909,54.483) C13.2@104.324,53.662 ; 104.001,54.583 cw(c104.211,54.373) v1@104.211,54.67 ; 104.001,54.583 ccw(c103.791,54.793) v1@104.088,54.793 ; 104.001,54.583 cw(c104.211,54.373) v1@104.211,54.67 ; 104.001,54.583 ccw(c103.791,54.793) v1@104.088,54.793 ; 104.001,54.583 cw(c104.211,54.373) v1@104.211,54.67 ; 104.001,54.583 ccw(c103.791,54.793) v1@104.088,54.793
  Bottom Layer w0.5: L1.2 95.504,51.117 C8.2 C11.2 v2(97.028,52.451) ; v1(98.171,59.309) 98.679,59.309 ; v1(98.679,56.261) 98.679,59.309 ; v1(105.156,61.849) 104.402,62.603 v1(101.727,62.603) 100.584,62.603 100.076,62.095 100.076,59.944 99.441,59.309 98.679,59.309 ; L1.2@94.813,51.536 cw(c93.71,50.121) C8.2@95.504,50.121 ; L1.2@94.813,51.536 cw(c93.71,50.121) C8.2@95.504,50.121 ; L1.2@94.813,51.536 cw(c93.71,50.121) C8.2@95.504,50.121 ; L1.2@94.922,51.495 cw(c94.889,50.881) 95.504,50.881 ; L1.2@94.922,51.495 cw(c94.889,50.881) 95.504,50.881 ; L1.2@94.922,51.495 cw(c94.889,50.881) 95.504,50.881 ; L1.2@94.932,51.494 cw(c94.932,51.025) L1.2@95.265,51.357 ; L1.2@94.932,51.494 cw(c94.932,51.025) L1.2@95.265,51.357 ; L1.2@94.932,51.494 cw(c94.932,51.025) L1.2@95.265,51.357 ; L1.2@95.12,51.93 cw(c94.508,51.144) 95.504,51.144 ; L1.2@95.12,51.93 cw(c94.508,51.144) 95.504,51.144 ; L1.2@95.12,51.93 cw(c94.508,51.144) 95.504,51.144 ; L1.2@95.127,51.689 ccw(c95.597,51.689) L1.2@95.265,51.357 ; L1.2@95.127,51.689 ccw(c95.597,51.689) L1.2@95.265,51.357 ; L1.2@95.127,51.689 ccw(c95.597,51.689) L1.2@95.265,51.357 ; 95.338,50.74 ccw(c95.884,50.886) C8.2@95.601,50.397 ; 95.338,50.74 ccw(c95.884,50.886) C8.2@95.601,50.397 ; 95.338,50.74 ccw(c95.884,50.886) C8.2@95.601,50.397 ; C8.2@95.366,50.366 ccw(c95.034,50.698) 95.504,50.698 ; C8.2@95.366,50.366 ccw(c95.034,50.698) 95.504,50.698 ; C8.2@95.366,50.366 ccw(c95.034,50.698) 95.504,50.698 ; 95.504,50.698 ccw(c95.974,50.698) C8.2@95.642,50.366 ; 95.504,50.698 ccw(c95.974,50.698) C8.2@95.642,50.366 ; 95.504,50.698 ccw(c95.974,50.698) C8.2@95.642,50.366 ; C8.2@95.642,50.091 cw(c95.974,49.759) 95.974,50.228 ; C8.2@95.642,50.091 cw(c95.974,49.759) 95.974,50.228 ; C8.2@95.642,50.091 cw(c95.974,49.759) 95.974,50.228 ; C8.2@95.642,50.366 ccw(c95.974,50.698) 95.974,50.228 ; C8.2@95.642,50.366 ccw(c95.974,50.698) 95.974,50.228 ; C8.2@95.642,50.366 ccw(c95.974,50.698) 95.974,50.228 ; 96.558,50.228 cw(c96.558,49.759) C11.2@96.89,50.091 ; 96.558,50.228 ccw(c96.558,50.698) C11.2@96.89,50.366 ; 96.558,50.228 cw(c96.558,49.759) C11.2@96.89,50.091 ; 96.558,50.228 ccw(c96.558,50.698) C11.2@96.89,50.366 ; 96.558,50.228 cw(c96.558,49.759) C11.2@96.89,50.091 ; 96.558,50.228 ccw(c96.558,50.698) C11.2@96.89,50.366 ; C11.2@96.89,50.366 ccw(c96.558,50.698) 97.028,50.698 ; C11.2@96.89,50.366 ccw(c96.558,50.698) 97.028,50.698 ; C11.2@96.89,50.366 ccw(c96.558,50.698) 97.028,50.698 ; 97.028,50.698 ccw(c97.498,50.698) C11.2@97.166,50.366 ; 97.028,50.698 ccw(c97.498,50.698) C11.2@97.166,50.366 ; 97.028,50.698 ccw(c97.498,50.698) C11.2@97.166,50.366 ; L1.2@95.04,51.527 cw(c95.221,51.255) 95.482,51.452 ccw(c95.221,51.255) L1.2@95.04,51.527 ; L1.2@95.125,51.662 ccw(c96.226,51.509) 95.339,50.839 cw(c96.226,51.509) L1.2@95.125,51.662
NetC5_2: C5.2 U1.2 | length 7.3
  Top Layer w0.254: v1@98.552,60.075 cw(c98.552,59.778) 98.762,59.988 cw(c98.972,60.198) v1@98.675,60.198 ; v1(98.552,60.198) 98.798,59.952 U1.2
  Bottom Layer w0.254: C5.2 96.329,60.198 v1(98.552,60.198) ; C5.2@96.12,59.899 cw(c96.842,59.177) 96.842,60.198 ; C5.2@96.3,59.719 cw(c97.455,58.564) 97.455,60.198 ; v1@98.465,60.111 ccw(c98.255,59.901) 98.255,60.198 ccw(c98.255,60.495) v1@98.465,60.285
NetC7_2: C7.2 U1.5 | length 11.7
  Top Layer w0.254: C7.2 95.822,59.245 96.615,58.452 U1.5 ; C7.2@95.597,62.513 cw(c95.055,61.971) 95.822,61.971 ; C7.2@95.597,62.513 cw(c95.055,61.971) 95.822,61.971 ; C7.2@95.597,62.513 cw(c95.055,61.971) 95.822,61.971 ; 95.822,61.971 cw(c96.588,61.971) C7.2@96.046,62.513 ; 95.822,61.971 cw(c96.588,61.971) C7.2@96.046,62.513 ; 95.822,61.971 cw(c96.588,61.971) C7.2@96.046,62.513
NetC9_2: C9.2 U1.6 | length 15.5
  Top Layer w0.254: C9.2 95.567,56.959 96.56,57.952 U1.6 ; C9.2@95.343,50.263 ccw(c94.801,50.805) 95.567,50.805 ; C9.2@95.343,50.263 ccw(c94.801,50.805) 95.567,50.805 ; C9.2@95.343,50.263 ccw(c94.801,50.805) 95.567,50.805 ; 95.567,50.805 ccw(c96.334,50.805) C9.2@95.792,50.263 ; 95.567,50.805 ccw(c96.334,50.805) C9.2@95.792,50.263 ; 95.567,50.805 ccw(c96.334,50.805) C9.2@95.792,50.263
NetC10_2: C10.2 U1.7 | length 10.6
  Top Layer w0.254: v1(97.663,57.15) 97.965,57.452 U1.7 ; v1@97.663,57.273 ccw(c97.663,57.57) 97.873,57.36 ; v1@97.663,57.273 ccw(c97.663,57.57) 97.873,57.36 ; v1@97.663,57.273 ccw(c97.663,57.57) 97.873,57.36 ; v1@97.786,57.15 cw(c98.083,57.15) 97.873,57.36 ; v1@97.786,57.15 cw(c98.083,57.15) 97.873,57.36 ; v1@97.786,57.15 cw(c98.083,57.15) 97.873,57.36
  Bottom Layer w0.254: C10.2 v1(97.663,57.15) ; C10.2@96.3,56.925 cw(c96.842,56.383) 96.842,57.15 ; C10.2@96.3,56.925 cw(c96.842,56.383) 96.842,57.15 ; C10.2@96.3,56.925 cw(c96.842,56.383) 96.842,57.15 ; C10.2@96.3,57.375 ccw(c96.842,57.917) 96.842,57.15 ; C10.2@96.3,57.375 ccw(c96.842,57.917) 96.842,57.15 ; C10.2@96.3,57.375 ccw(c96.842,57.917) 96.842,57.15 ; 97.366,57.15 cw(c97.366,56.853) v1@97.576,57.063 ; 97.366,57.15 ccw(c97.366,57.447) v1@97.576,57.237 ; 97.366,57.15 cw(c97.366,56.853) v1@97.576,57.063 ; 97.366,57.15 ccw(c97.366,57.447) v1@97.576,57.237 ; 97.366,57.15 cw(c97.366,56.853) v1@97.576,57.063 ; 97.366,57.15 ccw(c97.366,57.447) v1@97.576,57.237
NetC14_2: C14.2 U1.10 | length 9.9
  Top Layer w0.254: v1(100.711,55.118) 101.211,55.618 U1.10 ; v1@100.711,55.241 ccw(c100.711,55.538) 100.921,55.328 ; v1@100.711,55.241 ccw(c100.711,55.538) 100.921,55.328 ; v1@100.711,55.241 ccw(c100.711,55.538) 100.921,55.328 ; v1@100.834,55.118 cw(c101.131,55.118) 100.921,55.328 ; v1@100.834,55.118 cw(c101.131,55.118) 100.921,55.328 ; v1@100.834,55.118 cw(c101.131,55.118) 100.921,55.328
  Bottom Layer w0.254: C14.2 100.076,54.483 v1(100.711,55.118) ; C14.2@99.851,53.501 ccw(c99.309,54.043) 100.076,54.043 ; C14.2@99.851,53.501 ccw(c99.309,54.043) 100.076,54.043 ; C14.2@99.851,53.501 ccw(c99.309,54.043) 100.076,54.043 ; 100.076,54.043 ccw(c100.843,54.043) C14.2@100.301,53.501 ; 100.076,54.043 ccw(c100.843,54.043) C14.2@100.301,53.501 ; 100.076,54.043 ccw(c100.843,54.043) C14.2@100.301,53.501 ; 100.501,54.908 cw(c100.711,54.698) v1@100.711,54.995 ; 100.501,54.908 ccw(c100.291,55.118) v1@100.588,55.118 ; 100.501,54.908 cw(c100.711,54.698) v1@100.711,54.995 ; 100.501,54.908 ccw(c100.291,55.118) v1@100.588,55.118 ; 100.501,54.908 cw(c100.711,54.698) v1@100.711,54.995 ; 100.501,54.908 ccw(c100.291,55.118) v1@100.588,55.118
NetC15_2: C15.2 U1.11 | length 9.5
  Top Layer w0.254: v1(101.711,55.102) U1.11 ; v1@101.624,55.189 ccw(c101.414,55.399) 101.711,55.399 ; v1@101.624,55.189 ccw(c101.414,55.399) 101.711,55.399 ; v1@101.624,55.189 ccw(c101.414,55.399) 101.711,55.399 ; 101.711,55.399 ccw(c102.008,55.399) v1@101.798,55.189 ; 101.711,55.399 ccw(c102.008,55.399) v1@101.798,55.189 ; 101.711,55.399 ccw(c102.008,55.399) v1@101.798,55.189
  Bottom Layer w0.254: C15.2 101.711,53.388 v1(101.711,55.102) ; C15.2@101.375,53.501 ccw(c100.566,54.311) 101.711,54.311 ; C15.2@101.375,53.501 ccw(c100.566,54.311) 101.711,54.311 ; C15.2@101.375,53.501 ccw(c100.566,54.311) 101.711,54.311 ; v1@101.624,55.015 cw(c101.414,54.805) 101.711,54.805 ; v1@101.624,55.015 cw(c101.414,54.805) 101.711,54.805 ; v1@101.624,55.015 cw(c101.414,54.805) 101.711,54.805 ; 101.711,53.775 ccw(c102.099,53.775) C15.2@101.825,53.501 ; 101.711,53.775 ccw(c102.099,53.775) C15.2@101.825,53.501 ; 101.711,53.775 ccw(c102.099,53.775) C15.2@101.825,53.501 ; 101.711,54.805 cw(c102.008,54.805) v1@101.798,55.015 ; 101.711,54.805 cw(c102.008,54.805) v1@101.798,55.015 ; 101.711,54.805 cw(c102.008,54.805) v1@101.798,55.015
NetC17_2: C17.2 R2.1 | length 8.7
  Top Layer w0.254: C17.2 R2.1 ; C17.2@101.185,51.279 ccw(c100.643,51.821) 101.409,51.821 ; C17.2@101.185,51.279 ccw(c100.643,51.821) 101.409,51.821 ; C17.2@101.185,51.279 ccw(c100.643,51.821) 101.409,51.821 ; R2.1@101.185,52.353 cw(c100.643,51.811) 101.409,51.811 ; R2.1@101.185,52.353 cw(c100.643,51.811) 101.409,51.811 ; R2.1@101.185,52.353 cw(c100.643,51.811) 101.409,51.811 ; 101.409,51.811 cw(c102.176,51.811) R2.1@101.634,52.353 ; 101.409,51.811 cw(c102.176,51.811) R2.1@101.634,52.353 ; 101.409,51.811 cw(c102.176,51.811) R2.1@101.634,52.353 ; 101.409,51.821 ccw(c102.176,51.821) C17.2@101.634,51.279 ; 101.409,51.821 ccw(c102.176,51.821) C17.2@101.634,51.279 ; 101.409,51.821 ccw(c102.176,51.821) C17.2@101.634,51.279
NetD1_1: D1.1 R1.1 | length 13.1
  Top Layer w0.254: D1.1 107.759,57.417 ; R1.1 107.759,57.417 ; D1.1@107.124,56.972 ccw(c107.124,57.432) 107.45,57.107 ; D1.1@107.124,56.972 ccw(c107.124,57.432) 107.45,57.107 ; D1.1@107.124,56.972 ccw(c107.124,57.432) 107.45,57.107 ; D1.1@107.203,56.491 ccw(c106.617,57.239) 107.56,57.124 ; D1.1@107.203,56.491 ccw(c106.617,57.239) 107.56,57.124 ; D1.1@107.203,56.491 ccw(c106.617,57.239) 107.56,57.124 ; D1.1@107.25,56.609 cw(c107.774,56.683) D1.1@107.4,57.057 ; D1.1@107.25,56.609 cw(c107.774,56.683) D1.1@107.4,57.057 ; D1.1@107.25,56.609 cw(c107.774,56.683) D1.1@107.4,57.057 ; D1.1@107.502,56.645 cw(c108.403,56.773) 107.759,57.417 ; D1.1@107.502,56.645 cw(c108.403,56.773) 107.759,57.417 ; D1.1@107.502,56.645 cw(c108.403,56.773) 107.759,57.417 ; R1.1@107.535,58.195 cw(c106.993,57.653) 107.759,57.653 ; R1.1@107.535,58.195 cw(c106.993,57.653) 107.759,57.653 ; R1.1@107.535,58.195 cw(c106.993,57.653) 107.759,57.653 ; 107.759,57.653 cw(c108.526,57.653) R1.1@107.984,58.195 ; 107.759,57.653 cw(c108.526,57.653) R1.1@107.984,58.195 ; 107.759,57.653 cw(c108.526,57.653) R1.1@107.984,58.195
NetR1_2: R1.2 U1.21 | length 1.5
  Top Layer w0.254: U1.21 105.576,58.952 R1.2
NetR2_2: R2.2 U1.14 | length 8.4
  Top Layer w0.254: R2.2 103.211,52.729 U1.14 ; R2.2@102.836,52.803 ccw(c101.931,53.708) 103.211,53.708 ; R2.2@102.836,52.803 ccw(c101.931,53.708) 103.211,53.708 ; R2.2@102.836,52.803 ccw(c101.931,53.708) 103.211,53.708 ; R2.2@103.016,52.623 ccw(c102.544,53.095) 103.211,53.095 ; R2.2@103.016,52.623 ccw(c102.544,53.095) 103.211,53.095 ; R2.2@103.016,52.623 ccw(c102.544,53.095) 103.211,53.095
RF_CE: U1.9 U2.9 | length 34.8
  Top Layer w0.254: v1(99.187,55.372) 100.152,56.337 U1.9 ; v1@99.187,55.495 ccw(c99.187,55.792) 99.397,55.582 ; v1@99.187,55.495 ccw(c99.187,55.792) 99.397,55.582 ; v1@99.187,55.495 ccw(c99.187,55.792) 99.397,55.582 ; v1@99.31,55.372 cw(c99.607,55.372) 99.397,55.582 ; v1@99.31,55.372 cw(c99.607,55.372) 99.397,55.582 ; v1@99.31,55.372 cw(c99.607,55.372) 99.397,55.582
  Bottom Layer w0.254: U2.9 91.181,65.537 ; v1(99.187,55.372) 98.171,54.356 92.71,54.356 91.948,55.118 91.948,64.77 91.181,65.537 ; U2.9@90.077,65.287 cw(c90.624,64.812) 90.624,65.537 ; U2.9@90.077,65.287 cw(c90.624,64.812) 90.624,65.537 ; U2.9@90.077,65.287 cw(c90.624,64.812) 90.624,65.537 ; U2.9@90.077,65.787 ccw(c90.624,66.262) 90.624,65.537 ; U2.9@90.077,65.787 ccw(c90.624,66.262) 90.624,65.537 ; U2.9@90.077,65.787 ccw(c90.624,66.262) 90.624,65.537 ; U2.9@90.269,65.121 cw(c91.181,64.329) 91.181,65.537 ; U2.9@90.269,65.121 cw(c91.181,64.329) 91.181,65.537 ; U2.9@90.269,65.121 cw(c91.181,64.329) 91.181,65.537 ; U2.9@90.269,65.953 ccw(c91.181,66.745) 91.181,65.537 ; U2.9@90.269,65.953 ccw(c91.181,66.745) 91.181,65.537 ; U2.9@90.269,65.953 ccw(c91.181,66.745) 91.181,65.537 ; 98.977,55.162 cw(c99.187,54.952) v1@99.187,55.249 ; 98.977,55.162 ccw(c98.767,55.372) v1@99.064,55.372 ; 98.977,55.162 cw(c99.187,54.952) v1@99.187,55.249 ; 98.977,55.162 ccw(c98.767,55.372) v1@99.064,55.372 ; 98.977,55.162 cw(c99.187,54.952) v1@99.187,55.249 ; 98.977,55.162 ccw(c98.767,55.372) v1@99.064,55.372
RF_SCK: U1.22 U2.4 | length 22.8
  Top Layer w0.254: U1.22 108.95,59.452 109.347,59.055 109.347,56.134 110.109,55.372 112.644,55.372 U2.4 ; 111.104,55.372 ccw(c111.104,56.922) U2.4@112.2,55.826 ; 111.104,55.372 ccw(c111.104,56.922) U2.4@112.2,55.826 ; 111.104,55.372 ccw(c111.104,56.922) U2.4@112.2,55.826 ; 111.128,55.372 cw(c111.128,53.856) U2.4@112.2,54.928 ; 111.128,55.372 cw(c111.128,53.856) U2.4@112.2,54.928 ; 111.128,55.372 cw(c111.128,53.856) U2.4@112.2,54.928 ; 111.717,55.372 ccw(c111.717,56.309) U2.4@112.38,55.646 ; 111.717,55.372 ccw(c111.717,56.309) U2.4@112.38,55.646 ; 111.717,55.372 ccw(c111.717,56.309) U2.4@112.38,55.646 ; 111.741,55.372 cw(c111.741,54.469) U2.4@112.38,55.108 ; 111.741,55.372 cw(c111.741,54.469) U2.4@112.38,55.108 ; 111.741,55.372 cw(c111.741,54.469) U2.4@112.38,55.108
RF_SDA: U1.23 U2.3 | length 34.2
  Top Layer w0.254: U1.23 109.466,59.952 109.855,59.563 109.855,57.023 110.358,56.52 113.406,56.52 113.919,56.007 113.919,54.107 U2.3 ; U2.3@112.525,52.862 cw(c113.511,52.66) 113.251,53.633 ; U2.3@112.525,52.862 cw(c113.511,52.66) 113.251,53.633 ; U2.3@112.525,52.862 cw(c113.511,52.66) 113.251,53.633 ; U2.3@112.649,53.218 ccw(c112.649,54.138) 113.299,53.487 ; U2.3@112.649,53.218 ccw(c112.649,54.138) 113.299,53.487 ; U2.3@112.649,53.218 ccw(c112.649,54.138) 113.299,53.487 ; U2.3@112.649,53.472 ccw(c112.649,55.005) 113.733,53.921 ; U2.3@112.649,53.472 ccw(c112.649,55.005) 113.733,53.921 ; U2.3@112.649,53.472 ccw(c112.649,55.005) 113.733,53.921 ; U2.3@112.674,52.713 ccw(c112.472,53.699) 113.445,53.439 ; U2.3@112.674,52.713 ccw(c112.472,53.699) 113.445,53.439 ; U2.3@112.674,52.713 ccw(c112.472,53.699) 113.445,53.439 ; U2.3@113.03,52.837 cw(c113.95,52.837) 113.299,53.487 ; U2.3@113.03,52.837 cw(c113.95,52.837) 113.299,53.487 ; U2.3@113.03,52.837 cw(c113.95,52.837) 113.299,53.487 ; U2.3@113.284,52.837 cw(c114.817,52.837) 113.733,53.921 ; U2.3@113.284,52.837 cw(c114.817,52.837) 113.733,53.921 ; U2.3@113.284,52.837 cw(c114.817,52.837) 113.733,53.921
VCC3.3: C16.2 L1.1 U2.15 | length 16.3
  Bottom Layer w0.5: U2.15 93.149,50.297 C16.2 93.218,51.625 L1.1 ; U2.15@90.151,49.935 cw(c91.025,49.061) 91.025,50.297 ; U2.15@90.151,49.935 cw(c91.025,49.061) 91.025,50.297 ; U2.15@90.151,49.935 cw(c91.025,49.061) 91.025,50.297 ; U2.15@90.151,50.659 ccw(c91.025,51.533) 91.025,50.297 ; U2.15@90.151,50.659 ccw(c91.025,51.533) 91.025,50.297 ; U2.15@90.151,50.659 ccw(c91.025,51.533) 91.025,50.297 ; 92.583,50.297 cw(c92.583,49.594) C16.2@93.08,50.091 ; 92.583,50.297 cw(c92.583,49.594) C16.2@93.08,50.091 ; 92.583,50.297 cw(c92.583,49.594) C16.2@93.08,50.091 ; C16.2@93.08,50.366 ccw(c92.748,50.698) 93.218,50.698 ; C16.2@93.08,50.366 ccw(c92.748,50.698) 93.218,50.698 ; C16.2@93.08,50.366 ccw(c92.748,50.698) 93.218,50.698 ; 93.218,50.698 ccw(c93.688,50.698) C16.2@93.356,50.366 ; 93.218,50.698 ccw(c93.688,50.698) C16.2@93.356,50.366 ; 93.218,50.698 ccw(c93.688,50.698) C16.2@93.356,50.366 ; 93.218,51.066 cw(c93.904,51.066) L1.1@93.419,51.551 ; 93.218,51.066 cw(c93.904,51.066) L1.1@93.419,51.551 ; 93.218,51.066 cw(c93.904,51.066) L1.1@93.419,51.551
pads on no net: U1.1 U1.13 U1.15 U1.17 U1.18 U1.19 U1.20 U1.24 U1.30 U1.31 U1.32 U2.5 U2.6 U2.10 U2.11 U2.12 U2.13 U2.14

## Polygon pours and split planes (outlines as drawn)
GND on Top Layer "Bottom Layer-No Net" (solid, pour order 6): 87.249,59.563 87.249,44.196 87.249,43.553 88.033,42.769 88.13,42.672 91.313,42.672 114.218,42.672 115.156,43.61 115.189,43.643 115.189,48.895 115.189,70.276 114.251,71.214 114.091,71.374 111.379,71.374 88.166,71.374 87.41,70.617 87.249,70.457 87.249,68.834
GND on Bottom Layer "Bottom Layer-No Net" (solid, pour order 8): 87.249,53.848 87.249,44.196 87.249,43.553 88.033,42.769 88.13,42.672 92.075,42.672 114.308,42.672 115.092,43.456 115.189,43.553 115.189,45.847 115.189,70.366 114.405,71.15 114.308,71.247 112.776,71.247 88.22,71.247 87.282,70.309 87.249,70.276 87.249,69.469

## Keep-outs
Keep-Out Layer:
  the board outline again, w0.254

## Silkscreen, mask and mechanical layers (free items; w line width, h text height)
Top Overlay:
  lines w0.254: 88.519,64.262 91.059,64.262 ; 90.932,46.101 91.059,46.101 ; 111.379,43.688 113.792,46.101 113.919,46.101 ; 111.379,64.262 113.919,64.262 ; 91.059,46.101 88.519,46.101 88.519,66.675 91.059,66.675 91.059,46.101 ; 113.919,46.101 111.379,46.101 111.379,66.675 113.919,66.675 113.919,46.101
  text "AN/CE" at 88.9,67.31 h0.5
  text "AON/PWM" at 107.569,64.77 h0.5
  text "AOP/INT" at 107.823,62.738 h0.5
  text "RST" at 91.44,62.484 h0.5
  text "CS" at 91.44,60.325 h0.5
  text "RX" at 110.109,60.071 h0.5
  text "SCK" at 91.313,57.785 h0.5
  text "TX" at 110.109,57.658 h0.5
  text "MISO" at 91.44,55.118 h0.5
  text "SCK" at 109.728,54.991 h0.5
  text "MOSI" at 91.313,52.705 h0.5
  text "SDA" at 109.728,52.578 h0.5
  text "+5V" at 109.601,49.911 h0.5
  text "+3.3V" at 90.932,49.784 h0.5
  text "GND" at 91.44,47.625 h0.5
  text "GND" at 109.601,47.498 h0.5

## Text inside footprints (layer, text, board x,y; h text height)
U2: Top Overlay "Mikro Bus" at 95.86,68.25 h1.2